# Altium PCB Leiterplatte.PcbDoc
Units mil, origin at the board's own origin, x right, y up, seen from the top; angles counter-clockwise.
Board outline 4527.56 x 2165.36 mil, 2 copper layers (Top Layer, Bottom Layer); 39 components, 62 nets, 272 pads, 218 vias.
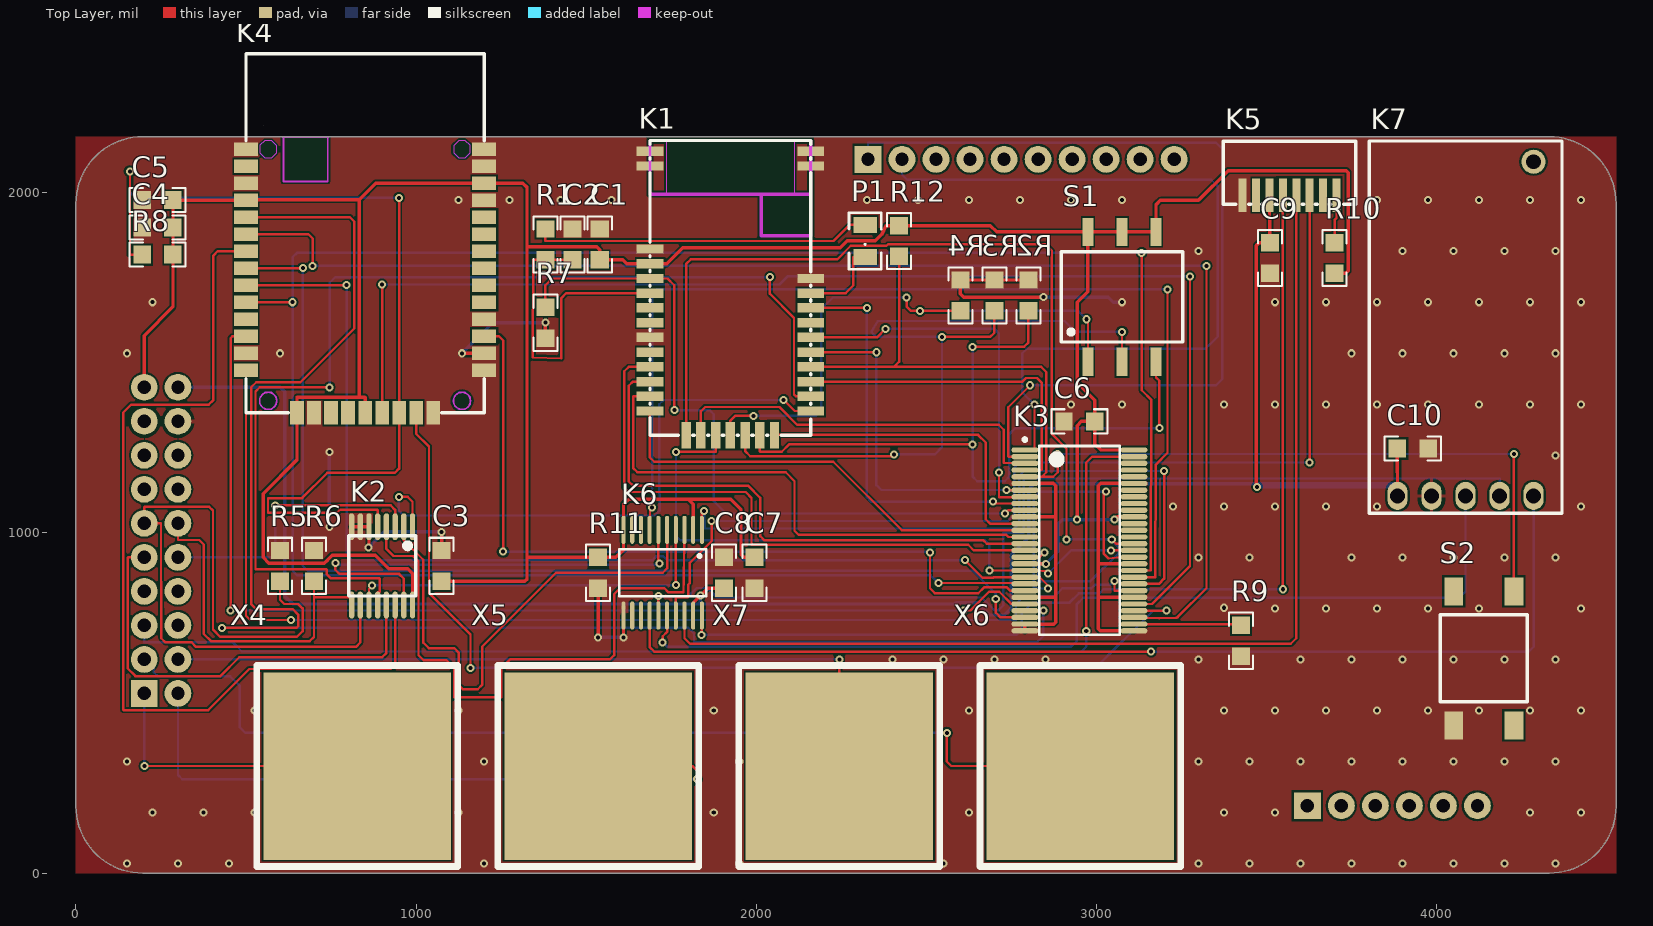
[diagram p0: Top Layer view]
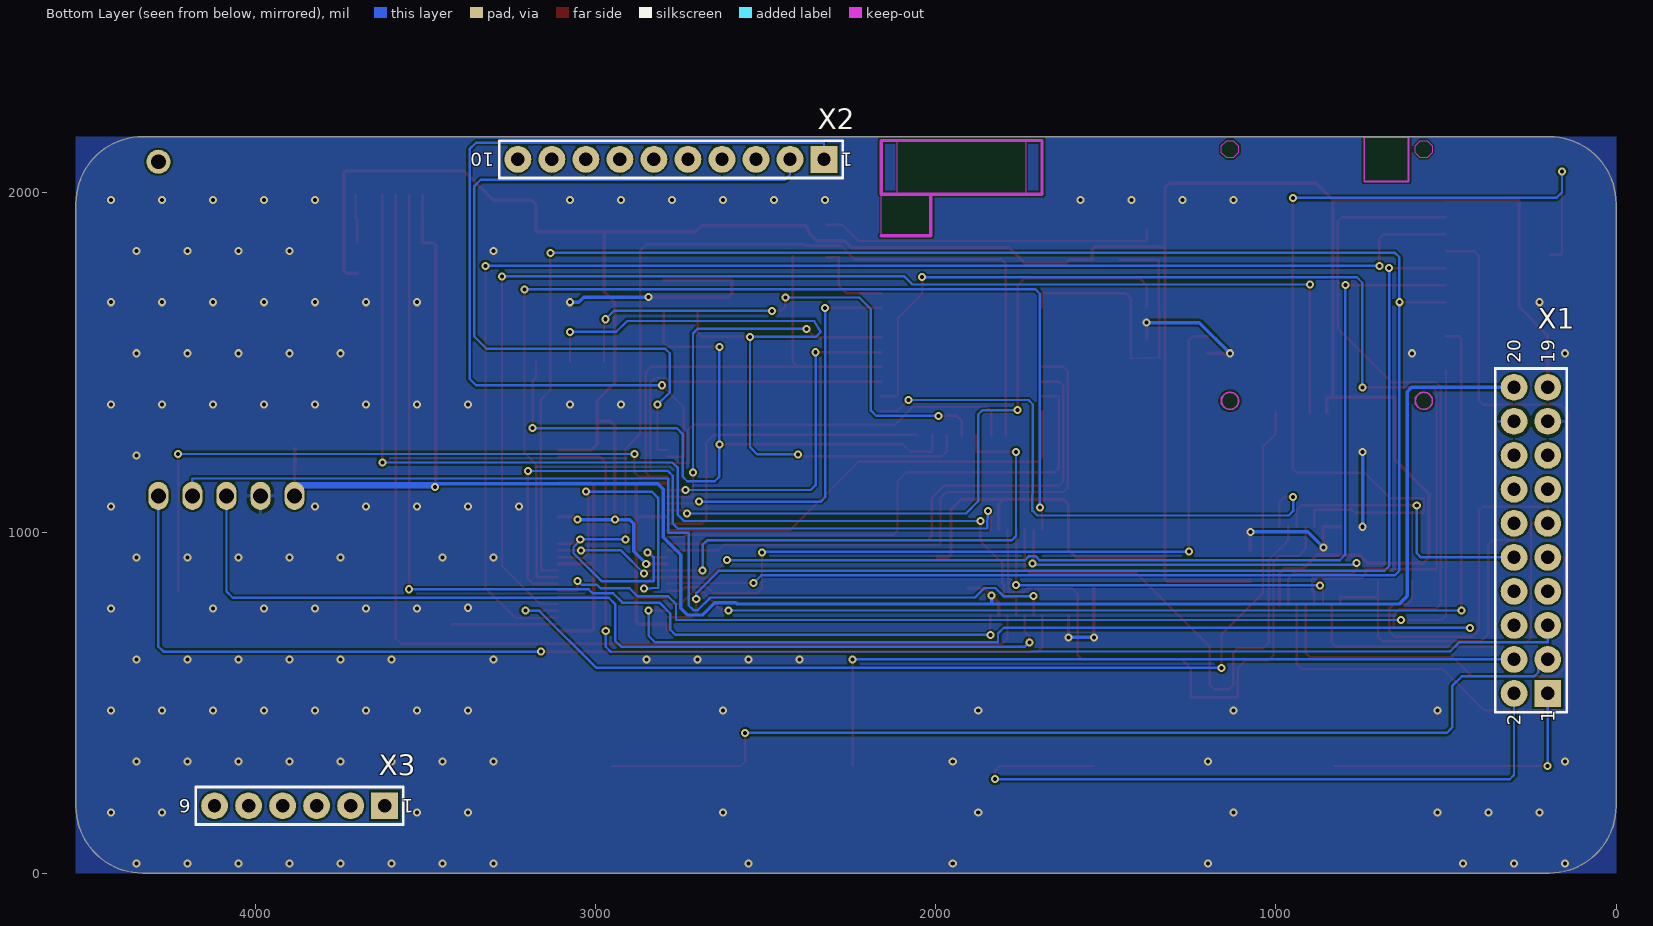
[diagram p1: Bottom Layer view, seen from below]

## Layer stack, top to bottom
Top Solder: solder mask 0.4, Solder Resist, Dk 3.5
Top Layer: signal copper 1.4
Dielectric 1: dielectric 12.6, FR-4, Dk 4.8
Bottom Layer: signal copper 1.4
Bottom Solder: solder mask 0.4, Solder Resist, Dk 3.5

## Board outline
196.85,0 cw(c196.85,196.85) 0,196.85 0,1968.5 cw(c196.85,1968.5) 196.85,2165.35 4330.71,2165.35 cw(c4330.71,1968.5) 4527.56,1968.5 4527.56,196.85 cw(c4330.71,196.85) 4330.71,0

## Design rules (kind name [scope] priority, off if disabled: settings)
AcuteAngle [All] p1: minimum=1.35000000000000E+0002 checktracksonly=FALSE
Clearance [All] p1: gap=6 ignorepadtopadclearanceinfootprint=TRUE
ComponentClearance [All] p1: gap=6 collisioncheckmode=3 verticalgap=6 showdistances=FALSE
HoleSize HoleSize_1 [All] p1: absolutevalues=TRUE maxlimit=100 minlimit=1 maxpercent=80.000 minpercent=20.000
MinimumAnnularRing [All] p1: minimumring=6
MinimumSolderMaskSliver [All] p1: minsoldermaskwidth=6
PlaneClearance [All] p1: clearance=10
PlaneConnect [All] p1: pad.planeconnectstyle=Direct pad.reliefexpansion=20 pad.reliefentries=4 pad.reliefconductorwidth=10 pad.reliefairgap=10 via.planeconnectstyle=Relief via.reliefexpansion=20 via.reliefentries=4 via.reliefconductorwidth=10 via.reliefairgap=10
PolygonConnect [All] p1: thpad.connectstyle=Relief thpad.reliefconductorwidth=10 thpad.reliefentries=4 thpad.polygonreliefangle="90 Angle" thpad.airgapwidth=10 smdpad.connectstyle=Direct smdpad.reliefconductorwidth=10 smdpad.reliefentries=4 smdpad.polygonreliefangle="90 Angle" smdpad.airgapwidth=10 via.connectstyle=Direct via.reliefconductorwidth=10 via.reliefentries=4 via.polygonreliefangle="90 Angle" via.airgapwidth=10
RoutingCorners [All] p1: cornerstyle=45-Degree minsetback=50 maxsetback=50
RoutingVias [All] p1: holewidth=11.81 width=23.62 viastyle="Through Hole" minholewidth=11.81 minwidth=23.62 maxholewidth=11.81 maxwidth=23.62
SMDEntry [All] p1: side=TRUE corner=TRUE anyangle=FALSE
SMDToCorner [All] p1: distance=50000
SilkToSilkClearance [All] p1: silktosilkclearance=6
SilkToSolderMaskClearance [IsPad] p1: minsilkscreentomaskgap=6 clearancetoexposedcopper=TRUE
SolderMaskExpansion [All] p1: expansion=4 istentingtop=FALSE
UnRoutedNet [All] p1: checkbadconnections=TRUE
Width POWER [InNetClass('POWER')] p1: maxlimit=15 minlimit=6 preferedwidth=10
Width STANDARD [All] p2: maxlimit=8 minlimit=6 preferedwidth=7
21 further rules are at their usual default settings.

## Classes and differential pairs
net class POWER: 3.3V 5V GND

## Components (designator, comment, footprint, x,y, rotation, side; value= is the part's Value field where it differs from the comment)
C1 "Capacitor" "CAP CER 0805 H" 1540,1848.35 r270 top value=10u
C2 "Capacitor" "CAP CER 0805 H" 1460,1848.35 r270 top value=1u
C3 "Capacitor" "CAP CER 0805 H" 1075,903.35 r270 top value=100nF
C4 "Capacitor" "CAP CER 0805 H" 240,1898.35 r0 top value=2.2u
C5 "Capacitor" "CAP CER 0805 H" 240,1978.35 r0 top value=0.1u
C6 "Capacitor" "CAP CER 0805 H" 2950,1328.35 r0 top value=100nF
C7 "Capacitor" "CAP CER 0805 H" 1995,883.35 r270 top value=100nF
C8 "Capacitor" "CAP CER 0805 H" 1905,883.35 r270 top value=100nF
C9 "Capacitor" "CAP CER 0805 H" 3510,1808.35 r270 top value=10nF
C10 "Capacitor" "CAP CER 0805 H" 3930,1248.35 r0 top value=10nF
K1 "RN4678" "RN4678 Bluetooth Modul" 1687.56,2122.28 r0 top
K2 "DG4052E" TSSOP-16 900,903.35 r270 top
K3 "PCA9698DGG" TSSOP-56 2950,978.35 r0 top
K4 "RN1810" "RN1810 WLAN" 850,1740.85 r0 top
K5 "TFDU4101" "TFDU4101 INFRAROT MODUL" 3705.59,1993.35 r180 top
K6 "TXS0108EPWR" "TSSOP-20 H" 1725,883.35 r270 top
K7 "RF-UART-434-100M" RF-UART-434-100M 3885,1109.06 r0 top
P1 "LED" "LED 1206 blue R" 2320,1858.35 r90 top
R1 "Resistor" "RES 0805 H" 1380,1848.35 r270 top value=1K
R2 "Resistor" "RES 0805 H" 2800,1698.35 r270 top value=1K
R3 "Resistor" "RES 0805 H" 2700,1698.35 r270 top value=1K
R4 "Resistor" "RES 0805 H" 2600,1698.35 r270 top value=1K
R5 "Resistor" "RES 0805 H" 600,903.35 r270 top value=10k
R6 "Resistor" "RES 0805 H" 700,903.35 r270 top value=10k
R7 "Resistor" "RES 0805 H" 1380,1618.35 r90 top value=1K
R8 "Resistor" "RES 0805 H" 240,1818.35 r0 top value=100k
R9 "Resistor" "RES 0805 H" 3425,683.07 r90 top value=10k
R10 "Resistor" "RES 0805 H" 3700,1808.35 r270 top value=120
R11 "Resistor" "RES 0805 H" 1535,883.35 r90 top value=10k
R12 "Resistor" "RES 0805 H" 2420,1858.35 r90 top value=1K
S1 "DIP-Switch" "DIP Switch SMD 3 H" 3075,1694.29 r0 top
S2 "SW-PB" drucktaster 4050,434.65 r90 top
X1 "20 pole header" "Header THT male 2x10" 250,978.35 r90 bottom locked
X2 "10 pole header" "Header THT male 1x10" 2778.35,2098.35 r0 bottom locked
X3 "6 pole header" "Header THT male 1x6" 3870,198.35 r0 bottom locked
X4 "Header 2" TOUCHPADS 826.77,314.96 r0 top
X5 "Header 2" TOUCHPADS 1535.43,314.96 r0 top
X6 "Header 2" TOUCHPADS 2952.76,314.96 r0 top
X7 "Header 2" TOUCHPADS 2244.09,314.96 r0 top

## Footprints (in the part's own frame and the unit in brackets; to place one, negate y for a bottom-side part, rotate by r counter-clockwise, add the part's x,y. Pads: shape width x height; smd on the part's side, far side on the other; paste and mask are expansions set on the pad)
"CAP CER 0805 H" [mm] "0805 ceramic capacitor for hand soldering"
  rect 1.3x1.35 smd: 1(-1.15,0) 2(1.15,0)
  silkscreen extent -2.1,-0.9 2.1,0.9, body extent -1,-0.62 1,0.63, height 0.8
"DIP Switch SMD 3 H" [mm] "Dipswitch for surface mount / hand soldering"
  rect 0.8x2.1 smd: 1(-2.54,-4.85) 2(0,-4.85) 3(2.54,-4.85) 4(2.54,4.85) 5(0,4.85) 6(-2.54,4.85)
  silkscreen extent -4.54,-3.38 4.55,3.37, body extent -4.54,-4.95 4.55,4.95, height 4.15
drucktaster [mm]
  rect 2.1x1.4 smd: 1(0,0) 4(10,-4.5) ""(0,-4.5) ""(10,0)
  silkscreen extent 1.75,-5.5 8.25,1, body extent 0,-5.25 10,0.75, height 4.3
"Header THT male 1x6" [mm] "header for tht mounting / pitch = 2.54mm"
  rect 2x2 hole 1: 1(-6.35,0)
  round 2 hole 1: 2(-3.81,0) 3(-1.27,0) 4(1.27,0) 5(3.81,0) 6(6.35,0)
  silkscreen extent -7.75,-1.4 7.75,1.4, body extent -7.62,-1.24 7.62,1.25, height 8.54
"Header THT male 1x10" [mm] "header for tht mounting / pitch = 2.54mm"
  rect 2x2 hole 1: 1(-11.43,0)
  round 2 hole 1: 2(-8.89,0) 3(-6.35,0) 4(-3.81,0) 5(-1.27,0) 6(1.27,0) 7(3.81,0) 8(6.35,0) 9(8.89,0) 10(11.43,0)
  silkscreen extent -12.83,-1.4 12.83,1.4, body extent -12.7,-1.24 12.7,1.24, height 8.54
"Header THT male 2x10" [mm] "header for tht mounting / pitch = 2.54mm"
  rect 2x2 hole 1: 1(-11.43,-1.245)
  round 2 hole 1: 2(-11.43,1.27) 3(-8.89,-1.245) 4(-8.89,1.27) 5(-6.35,-1.245) 6(-6.35,1.27) 7(-3.81,-1.245) 8(-3.81,1.27) 9(-1.27,-1.245) 10(-1.27,1.27) 11(1.27,-1.245) 12(1.27,1.27) 13(3.81,-1.245) 14(3.81,1.27) 15(6.35,-1.245) 16(6.35,1.27) 17(8.89,-1.245) 18(8.89,1.27) 19(11.43,-1.245) 20(11.43,1.27)
  silkscreen extent -12.83,-2.67 12.83,2.67, body extent -12.7,-2.51 12.7,2.47, height 8.54
"LED 1206 blue R" [mm] "SMD LED for reflow soldering"
  rect 1.2x1.75 smd: A(1.2,0) C(-1.2,0)
  silkscreen extent -2.1,-1.2 2.1,1.2, body extent -1.6,-0.8 1.6,0.8, height 1.1
"RES 0805 H" [mm] "0805 resistor for hand soldering"
  rect 1.3x1.35 smd: 1(-1.15,0) 2(1.15,0)
  silkscreen extent -2.1,-0.9 2.1,0.9, body extent -1.15,-0.67 1.15,0.68, height 0.76
RF-UART-434-100M [mm]
  oval 1.5x2.1 hole 1.1: 1(0,0) 2(2.54,0) 3(5.08,0) 4(7.62,0) 5(10.16,0)
  round 1.8 hole 1.1: ""(10.16,24.95)
  silkscreen extent -2.12,-1.3 12.28,26.5, body extent -1.28,-1.3 11.42,1.24, height 4.45
"RN1810 WLAN" [mil]
  rect 70x40 smd: 1(-350,387.5) 2(-350,337.5) 3(-350,287.5) 4(-350,237.5) 5(-350,187.5) 6(-350,137.5) 7(-350,87.5) 8(-350,37.5) 9(-350,-12.5) 10(-350,-62.5) 11(-350,-112.5) 12(-350,-162.5) 13(-350,-212.5) 14(-350,-262.5) 24(350,-262.5) 25(350,-212.5) 26(350,-162.5) 27(350,-112.5) 28(350,-62.5) 29(350,-12.5) 30(350,37.5) 31(350,87.5) 32(350,137.5) 33(350,187.5) 34(350,237.5) 35(350,287.5) 36(350,337.5) 37(350,387.5)
  rect 40x70 smd: 15(-200,-387.5) 16(-150,-387.5) 17(-100,-387.5) 18(-50,-387.5) 19(0,-387.5) 20(50,-387.5) 21(100,-387.5) 22(150,-387.5) 23(200,-387.5)
  Top Layer keep-out circle w5: c285,-352.5 r25
  Top Layer keep-out circle w5: c-285,-352.5 r25
  Top Layer keep-out region: -240,292.5 -110,292.5 -110,422.5 -240,422.5
  Top Layer keep-out region: -300,457.5
  Top Layer keep-out region: -295,412.5 -309,398.5 -309,376.5 -295,362.5 -275,362.5 -260,377.5 -260,397.5 -275,412.5
  Top Layer keep-out region: 275,412.5 260,397.5 260,377.5 275,362.5 295,362.5 309,376.5 309,398.5 295,412.5
  Top Layer keep-out region: 275,-327.5 260,-342.5 260,-362.5 275,-377.5 295,-377.5 310,-362.5 310,-342.5 295,-327.5
  Top Layer keep-out region: -295,-327.5 -310,-342.5 -310,-362.5 -295,-377.5 -275,-377.5 -260,-362.5 -260,-342.5 -275,-327.5
  Top Layer keep-out lines w5: -240,292.5 -110,292.5 -110,422.5 -240,422.5 -240,292.5
  Bottom Layer keep-out circle w5: c285,-352.5 r25
  Bottom Layer keep-out circle w5: c-285,-352.5 r25
  Bottom Layer keep-out region: -240,292.5 -110,292.5 -110,422.5 -240,422.5
  Bottom Layer keep-out region: -295,412.5 -310,397.5 -310,377.5 -295,362.5 -275,362.5 -260,377.5 -260,397.5 -275,412.5
  Bottom Layer keep-out region: 275,412.5 260,397.5 260,377.5 275,362.5 295,362.5 310,377.5 310,397.5 295,412.5
  Bottom Layer keep-out region: 275,-327.5 260,-342.5 260,-362.5 275,-377.5 295,-377.5 310,-362.5 310,-342.5 295,-327.5
  Bottom Layer keep-out region: -295,-327.5 -310,-342.5 -310,-362.5 -295,-377.5 -275,-377.5 -260,-362.5 -260,-342.5 -275,-327.5
  Bottom Layer keep-out lines w5: -240,292.5 -110,292.5 -110,422.5 -240,422.5 -240,292.5
  silkscreen extent -350,-388 350,668
"RN4678 Bluetooth Modul" [mm]
  rect 2x0.7 smd: 1(0,0) 2(0,-1.1) 3(0,-7.3) 4(0,-8.4) 5(0,-9.5) 6(0,-10.6) 7(0,-11.7) 8(0,-12.8) 9(0,-13.9) 10(0,-15) 11(0,-16.1) 12(0,-17.2) 13(0,-18.3) 14(0,-19.4) 22(12,-19.4) 23(12,-18.3) 24(12,-17.2) 25(12,-16.1) 26(12,-15) 27(12,-13.9) 28(12,-12.8) 29(12,-11.7) 30(12,-10.6) 31(12,-9.5) 32(12,-1.1) 33(12,0)
  rect 0.7x2 smd: 15(2.7,-21.2) 16(3.8,-21.2) 17(4.9,-21.2) 18(6,-21.2) 19(7.1,-21.2) 20(8.2,-21.2) 21(9.3,-21.2)
  Top Layer keep-out region: 8.3,-6.3 12,-6.3 12,-3.2 8.3,-3.2
  Top Layer keep-out region: 1.2,-3.2 10.8,-3.2 10.8,0.8 1.2,0.8
  Top Layer keep-out lines w0.254: 12,-3.2 12,-6.3 8.3,-6.3 8.3,-3.2 12,-3.2 ; 12,-3.2 0,-3.2 0,0.8 12,0.8 12,-3.2
  Bottom Layer keep-out region: 8.3,-6.3 12,-6.3 12,-3.2 8.3,-3.2
  Bottom Layer keep-out region: 1.2,-3.2 10.8,-3.2 10.8,0.8 1.2,0.8
  Bottom Layer keep-out lines w0.254: 12,-6.3 8.3,-6.3 8.3,-3.2 12,-3.2 ; 12,-3.2 0,-3.2 0,0.8 12,0.8 12,-3.2
  silkscreen extent 0,-21.2 12,0.8, body extent 0,-21.2 12,0.8, height 2.4
"TFDU4101 INFRAROT MODUL" [mm]
  rect 0.6x2.5 smd: 1(0,0) 2(1,0) 3(2,0) 4(3,0) 5(4,0) 6(5,0) 7(6,0) 8(7,0)
  silkscreen extent -1.45,-4.02 8.45,0.67, body extent -1.45,-4.02 8.45,0.68, height 4.15
TOUCHPADS [mm]
  rect 14x14 smd: 1(0,0)
  silkscreen extent -7.5,-7.5 7.5,7.5
TSSOP-16 [mm]
  oval 2x0.4 smd: 1(-2.925,2.275) 2(-2.925,1.625) 3(-2.925,0.975) 4(-2.925,0.325) 5(-2.925,-0.325) 6(-2.925,-0.975) 7(-2.925,-1.625) 8(-2.925,-2.275) 9(2.925,-2.275) 10(2.925,-1.625) 11(2.925,-0.975) 12(2.925,-0.325) 13(2.925,0.325) 14(2.925,0.975) 15(2.925,1.625) 16(2.925,2.275)
  silkscreen extent -2.25,-2.5 2.25,2.5, body extent -3.2,-2.55 3.2,2.55, height 1.1
"TSSOP-20 H" [mm] "TSSOP-20 for hand soldering"
  oval 2.1x0.3 smd: 1(-3.2,2.925) 2(-3.2,2.275) 3(-3.2,1.625) 4(-3.2,0.975) 5(-3.2,0.325) 6(-3.2,-0.325) 7(-3.2,-0.975) 8(-3.2,-1.625) 9(-3.2,-2.275) 10(-3.2,-2.925) 11(3.2,-2.925) 12(3.2,-2.275) 13(3.2,-1.625) 14(3.2,-0.975) 15(3.2,-0.325) 16(3.2,0.325) 17(3.2,0.975) 18(3.2,1.625) 19(3.2,2.275) 20(3.2,2.925)
  silkscreen extent -1.75,-3.25 1.75,3.25, body extent -3.2,-3.25 3.2,3.25, height 1.2
TSSOP-56 [mm]
  oval 2x0.4 smd: 1(-4.075,6.75) 2(-4.075,6.25) 3(-4.075,5.75) 4(-4.075,5.25) 5(-4.075,4.75) 6(-4.075,4.25) 7(-4.075,3.75) 8(-4.075,3.25) 9(-4.075,2.75) 10(-4.075,2.25) 11(-4.075,1.75) 12(-4.075,1.25) 13(-4.075,0.75) 14(-4.075,0.25) 15(-4.075,-0.25) 16(-4.075,-0.75) 17(-4.075,-1.25) 18(-4.075,-1.75) 19(-4.075,-2.25) 20(-4.075,-2.75) 21(-4.075,-3.25) 22(-4.075,-3.75) 23(-4.075,-4.25) 24(-4.075,-4.75) 25(-4.075,-5.25) 26(-4.075,-5.75) 27(-4.075,-6.25) 28(-4.075,-6.75) 29(4.075,-6.75) 30(4.075,-6.25) 31(4.075,-5.75) 32(4.075,-5.25) 33(4.075,-4.75) 34(4.075,-4.25) 35(4.075,-3.75) 36(4.075,-3.25) 37(4.075,-2.75) 38(4.075,-2.25) 39(4.075,-1.75) 40(4.075,-1.25) 41(4.075,-0.75) 42(4.075,-0.25) 43(4.075,0.25) 44(4.075,0.75) 45(4.075,1.25) 46(4.075,1.75) 47(4.075,2.25) 48(4.075,2.75) 49(4.075,3.25) 50(4.075,3.75) 51(4.075,4.25) 52(4.075,4.75) 53(4.075,5.25) 54(4.075,5.75) 55(4.075,6.25) 56(4.075,6.75)
  silkscreen extent -4.2,-7.05 3,7.65, body extent -4.1,-7.05 4,7.05, height 1.2

## Part data
C1 C2 C3 C4 C5 C6 C7 C8 C9 C10: "Non polarized capacitor", LatestRevisionDate=01.04.2019, Publisher="ICT Berufsbildungscenter AG"
K1: library part Bluetooth-Modul, "Bluetooth-Module (802.15.1) Bluetooth 5 Dual Mode with Shield & Antenna Module with ASCII Interface FW 1.11", Supplier Part Number 1=579-RN4678-V/RM111, ComponentLink1Description="New link", ComponentLink1URL=https://www.mouser.ch/ProductDetail/Microchip-Technology/RN4678-V-RM111/?qs=sGAEpiMZZMu3sxpa5v1qrgkV%252BmLWY283d9hxH7L%2F%2FyI%3D, Supplier 1=Mouser
K2: library part AnalogSwitch, "Analogschalter IC Dual 4 Ch Multiplxr Pd 450mW TSSOP-16", Supplier Part Number 1=78-DG4052EEQ-T1-GE3, ComponentLink1Description="New link", ComponentLink1URL=https://www.mouser.ch/ProductDetail/Vishay-Siliconix/DG4052EEQ-T1-GE3/?qs=sGAEpiMZZMutXGli8Ay4kBLYPnxy%2FFiifqIQaprXThA%3D, Supplier 1=Mouser
K3: library part PortExpander, "Schnittstelle - I/O-Erweiterer 40BT I2C FM+TPGPIO IN-RS-PU OE", Supplier Part Number 1=771-PCA9698DGG-T, ComponentLink1Description="New link", ComponentLink1URL=https://www.mouser.ch/ProductDetail/NXP-Semiconductors/PCA9698DGG518/?qs=LOCUfHb8d9vt%2F8QN9%2FBdTQ%3D%3D, Supplier 1=Mouser
K4: library part WLAN-Modul, "WLAN-Module (802.11) On board WiFiWiFly UART and PCB antenna", Supplier Part Number 1=579-RN1810IRM110, ComponentLink1Description="New link", ComponentLink1URL=https://www.mouser.ch/ProductDetail/Microchip-Technology/RN1810-I-RM110/?qs=Gd3Cm49KlLOYbRKPwYAFPg%3D%3D, Supplier 1=Mouser
K5: library part Infrarot-Modul, "Infrarot-Transceiver SIR 115.2 kbits/s", Supplier Part Number 1=782-TFDU4101, ComponentLink1Description="New link", ComponentLink1URL=https://www.mouser.ch/ProductDetail/Vishay-Semiconductors/TFDU4101-TR3/?qs=4vzNq8kLoSZaXF7Bmpq4%252Bw%3D%3D, Supplier 1=Mouser
K6: "Level Shifter with internal pullups", Supplier Part Number 1=595-TXS0108EPWR, Supplier 1=Mouser
K7: library part RF-Modul, "RF-Modul UART/TTL Interface 100M", ComponentLink1Description="New link", ComponentLink1URL=https://www.cytron.io/p-434mhz-rf-transceiver-module-uart-100m
P1: "Light emitting diode", LatestRevisionDate=03.04.2019, Publisher="ICT Berufsbildungscenter AG"
S1: library part "DIP-Switch 3", "Dip Switch with 3 switches", ComponentLink1Description="Manufacturer Link", ComponentLink1URL=http://www.oupiin.com/prodindx.html#Headers, LatestRevisionDate=03.10.2019, Published=03.10.2019, Publisher="ICT Berufsbildungscenter AG"
S2: library part Drucktaster, "Switch, SMD", LatestRevisionDate=17-Jul-2002, LatestRevisionNote="Re-released for DXP Platform.", PackageDescription="Switch; 2 Leads", PackageReference=SPST-2, Published=24-Mar-1999, Publisher="Altium Limited"
X1: library part "Header 20", "board to board header", LatestRevisionDate=02.05.2019, Publisher="ICT Berufsbildungscenter AG"
X2: library part "Header 10", "board to board header", LatestRevisionDate=02.05.2019, Publisher="ICT Berufsbildungscenter AG"
X3: library part "Header 6", "board to board header", LatestRevisionDate=02.05.2019, Publisher="ICT Berufsbildungscenter AG"
X4 X5 X6 X7: library part "Header 1", "Header, 2-Pin", LatestRevisionDate=17-Jul-2002, LatestRevisionNote="Re-released for DXP Platform.", Publisher="Altium Limited"
R1 R2 R3 R4 R5 R6 R7 R8 R9 R10 R11 R12: LatestRevisionDate=02.04.2019, Publisher="ICT Berufsbildungscenter AG"

## Via types
v1: diameter 23.62, hole 11.81, Top Layer to Bottom Layer, 218 vias

## Nets (pads, with @x,y where several pads share a name; then routed paths per layer and width w, separated by ;. In a path a pad name is that pad's centre, name@x,y a point inside that pad or via, vN(x,y) a via of type N, cw(c..) or ccw(c..) an arc to the next point about the centre after c; other vN are vias at no path point)
3.3V: C1.2 C3.2 C4.2 C5.2 C6.2 C7.1 K1.4 K2.16 K3.18 K3.46 K3.56 K4.4 K4.15 K4.19 K4.35 K6.2 K6.10 R8.2 R10.2 R11.2 R12.2 S1.4 S1.5 S1.6 X1.19 | length 10533.3
  Top Layer w10: X1.19 200.99,1580.35 285.28,1664.63 R8.2 C4.2 C5.2 K4.4 501.56,1979.91 833,1979.91 881.44,2028.35 K4.35 1313.5,2028.35 1326,2015.85 1326,1838.35 ; 833,1978.93 833,1399.6 832.75,1399.35 ; K4.19 850,1398.35 849,1399.35 832.75,1399.35 ; K2.16 989.57,879.78 975,894.35 919.5,894.35 879.5,934.35 753.24,934.35 739.69,920.8 739.69,920.59 730.45,911.35 567.19,911.35 550.19,928.35 550.19,1115.35 650,1215.16 K4.15 650,1398.35 651,1399.35 832.75,1399.35 ; C3.2 1319.72,858.07 1326,864.35 1326,928.62 ; K6.2 1814.57,1084.78 1800,1099.35 ; C7.1 1963.43,928.62 1955,937.05 1955,1069.35 1925,1099.35 1800,1099.35 ; K3.18 v1(2851,909.45) ; v1(2943,1039.35) 2943,1315.85 2955.5,1328.35 C6.2 ; v1(3053,1039.35) 3060.9,1047.24 K3.46 ; K3.56 3012.5,1244.09 2995.28,1261.32 C6.2 ; R10.2 3731.57,1763.07 3740,1771.5 3740,2059.49 3734.14,2065.35 3387.5,2065.35 3300,1977.85 3187.5,1977.85 3175,1965.35 S1.4 S1.5 S1.6 ; 1326,928.62 1326,1838.35 ; 1326,928.62 R11.2 1587.5,928.62 1609.84,950.96 K6.10 1609.84,1084.19 1625,1099.35 1800,1099.35 ; 1326,1838.35 1329,1841.35 1531.14,1841.35 1540,1832.49 C1.2 1608,1803.07 1619.5,1791.57 K1.4 1737,1791.57 1784.03,1838.6 2246.8,1838.6 2266.93,1858.73 2350,1858.73 2369,1877.73 2381.78,1903.62 R12.2 2688,1903.62 2706.38,1885.24 S1.6 ; S1.6 2975,1709.35 2944,1678.35 2944,1441.35 2995.28,1390.07 C6.2
  Bottom Layer w10: v1(2851,909.45) 2887.5,945.95 2887.5,1026.85 2900,1039.35 v1(2943,1039.35) v1(3053,1039.35)
5V: C8.2 C9.1 C10.1 K5.6 K6.19 K7.1 X1.20 | length 6210.7
  Top Layer w10: K6.19 1814.91,757.71 1814.91,795.26 v1(1836,816.35) ; v1@1833.39,813.74 1857.72,838.07 C8.2 ; v1(3472,1135.35) 3470,1137.35 3470,1845.2 3478.43,1853.62 C9.1 3510,1922.35 3508.74,1923.61 K5.6 ; C10.1 3884.72,1178.62 3885,1178.35 K7.1
  Bottom Layer w10: X1.20 601.5,1428.35 614,1415.85 614,814.85 637.5,791.35 1835,791.35 ; v1@1836,814.85 v1(1836,816.35) 1835,815.35 1835,791.35 ; v1(3472,1135.35) K7.1@3885,1135.35 ; K7.1 K7.1@3885,1135.35 ; 1835,791.35 2583,791.35 2587,795.35 2650,795.35 2686.5,758.85 2729.62,758.85 2749.12,778.35 2749.12,935.66 2800.81,987.35 2800.81,1128.35 2816.81,1144.35 3885,1144.35 K7.1@3885,1135.35
aIR_IO_1: K3.36 K6.1 | length 2026.7
  Top Layer w7: K6.1 1840.16,1063.35 1841.16,1064.35 v1(1847,1064.35) ; K3.36 3183.55,850.39 3199,865.85 v1(3199,1182.35)
  Bottom Layer w7: v1(1847,1064.35) 1848,1013.35 2758.31,1013.35 2773.31,1028.35 2773.31,1168.16 2787.5,1182.35 v1(3199,1182.35)
aIR_RX: K2.4 K6.3 | length 1807.2
  Top Layer w7: K2.4 912.8,953.35 933.8,932.35 990.5,932.35 1007,915.85 1007,640.85 1021.79,626.05 1089.29,626.05 1112,603.35 1112,517.35 1250,516.85 1250,601.85 1276.5,628.35 1569.5,628.35 1582,640.85 1582,820.03 1600,838.03 1729.57,838.03 1742.07,825.53 1786,825.53 1787.07,865.57 K6.3
aIR_TX: K2.11 K6.4 | length 1116.5
  Top Layer w7: K2.11 861.61,835.96 v1(871,845.35) ; v1(1763.39,846.85) K6.4
  Bottom Layer w7: v1(871,845.35) 872.5,846.85 v1(1763.39,846.85)
aRF_IO_1: K3.37 K6.7 | length 3144.2
  Top Layer w7: K6.7 1687.61,1075.35 v1(1694,1075.35) ; K3.37 3173.35,870.08 3174.61,1201.46 3209,1235.85 v1(3209,1716.35)
  Bottom Layer w7: v1(1694,1075.35) 1694,1703.35 1707,1716.35 v1(3209,1716.35)
aRF_RX: K2.2 K6.5 | length 1520
  Top Layer w7: K2.2 963.98,978.35 1021,921.32 1021,677.85 1037.5,661.35 1112.5,661.35 1125,648.85 1125,553.35 1137.5,540.85 1181.5,540.85 1194,553.35 1194,665.85 1411.5,883.35 1725,883.35 1737.8,896.14 K6.5
aRF_TX: K2.15 K6.6 | length 1368.2
  Top Layer w7: v1(762.5,911.35) 762.5,892.16 775,879.66 950.16,879.66 963.98,865.85 K2.15 ; K6.6 1712.2,914.14 v1(1716,910.35)
  Bottom Layer w7: v1(762.5,911.35) 762.5,908.35 763.82,907.02 1712.68,907.02 v1(1716,910.35)
bIR_IO_1: K5.5 K6.20 | length 3008.8
  Top Layer w7: v1(1839,700.35) 1840.16,701.5 K6.20 ; v1(3548.11,834.66) K5.5
  Bottom Layer w7: v1(1839,700.35) 2765,700.35 2780.5,715.85 2780.5,763.35 2812.5,795.35 2921,795.35 2948.5,822.85 3008.69,822.85 3020.5,834.66 v1(3548.11,834.66)
bIR_RX: K5.4 K6.18 | length 3181.2
  Top Layer w7: K6.18 1788.98,690.85 1805.48,674.35 3570.98,674.35 3587.48,690.85 K5.4
bIR_TX: K5.3 K6.17 | length 3037.1
  Top Layer w7: K6.17 1763.39,810.35 1764.39,811.35 1798.07,811.35 1800.07,813.35 1800.07,848.41 1805,853.35 1805,912.35 1869,976.35 v1(1869,1035.35) ; v1(3626.85,1207.35) K5.3
  Bottom Layer w7: v1(1869,1035.35) 2739.83,1035.35 2757.83,1053.35 2757.83,1190.85 2774.33,1207.35 v1(3626.85,1207.35)
bRF_IO_1: K6.14 K7.5 | length 3145.8
  Top Layer w7: K6.14 1686.61,664.73 1700,651.35 v1(3161,651.35)
  Bottom Layer w7: v1(3161,651.35) 4270.5,651.35 4285,665.85 K7.5
bRF_RX: K6.16 K7.3 | length 2860.2
  Top Layer w7: v1(1725,678.53) 1725,696.35 1737.8,709.14 K6.16
  Bottom Layer w7: v1(1725,678.53) 1737.5,666.03 2925,666.03 2942.42,683.46 2942.42,790.85 2961.42,809.85 4066.5,809.85 4085,828.35 K7.3
bRF_TX: K6.15 K7.4 | length 2995
  Top Layer w7: v1(1712,814.35) 1712.2,814.14 K6.15
  Bottom Layer w7: v1(1712,814.35) 1801,814.35 1825,838.35 1857,838.35 1885,810.35 2662.5,810.35 2699.5,773.35 2712.5,773.35 2726,786.85 2726,999.35 2727,1000.35 2785.31,1000.35 2786.31,1001.35 2786.31,1159.35 2787.31,1160.35 4184,1160.35 4185,1159.35 K7.4
BT_CTS: K1.15 K3.17 K3.42 | length 3155.1
  Top Layer w7: K1.15 1793.86,1790.85 1807.72,1804.7 2238.4,1804.7 2277.93,1844.23 2383,1844.23 2387.12,1848.35 2850,1848.35 2869,1829.35 2869,1290.85 2912,1247.85 v1(2912,981.35) ; K3.17 2832.79,929.13 v1(2847,943.35) ; v1(3045,981.35) 3057.84,968.5 K3.42
  Bottom Layer w7: v1(2847,943.35) 2844,943.35 2829,928.35 2829,859.51 2830,858.51 2982.69,858.51 3064.81,940.64 3064.81,958.35 3045,978.16 v1(3045,981.35) v1(2912,981.35)
BT_IO_1: K1.16 K3.3 | length 1152.9
  Top Layer w7: K1.16 1837.17,1357.7 1850,1370.53 2067.94,1370.53 2120.13,1318.35 2712.69,1318.35 2727.69,1303.35 2727.69,1206.03 K3.3
BT_IO_2: K1.24 K3.4 | length 995.2
  Top Layer w7: K1.24 2782.45,1445.12 2792.99,1455.66 2825,1455.66 2839.53,1441.13 2839.53,1186.35 2838.22,1185.04 K3.4
BT_IO_4: K1.26 K3.7 | length 1026.6
  Top Layer w7: K1.26 2352.61,1531.73 v1(2353,1531.35) ; v1(2735,1126.35) 2735,1125.98 K3.7
  Bottom Layer w7: v1(2353,1531.35) 2353,1140.85 2367.5,1126.35 v1(2735,1126.35)
BT_IO_5: K1.27 K3.8 | length 1128.6
  Top Layer w7: K1.27 2354.69,1575.04 v1(2380,1600.35) ; v1(2713.69,1178.35) 2713.69,1105.98 2715,1104.67 2756.7,1104.67 2756.7,1106.3 K3.8
  Bottom Layer w7: v1(2380,1600.35) 2700,1600.35 2713.69,1586.66 v1(2713.69,1178.35)
BT_IO_6: K1.29 K3.9 | length 1193.9
  Top Layer w7: K1.29 v1(2324.9,1661.65) ; v1(2696,1092.35) 2701.73,1086.61 K3.9
  Bottom Layer w7: v1(2324.9,1661.65) 2324.9,1104.94 2337.5,1092.35 v1(2696,1092.35)
BT_IO_7: K1.5 K3.10 R7.2 | length 2137.2
  Top Layer w7: R7.2 1380,1728.35 1399.92,1748.27 K1.5 1739.08,1748.27 1759,1728.35 v1(1759,1361.35) ; v1(2731,1057.35) 2740.58,1066.93 K3.10
  Bottom Layer w7: v1(1759,1361.35) 1862.5,1361.35 1875,1348.85 1875,1093.66 1911.31,1057.35 v1(2731,1057.35)
BT_IO_8: K1.21 K3.12 | length 976.7
  Top Layer w7: K1.21 2053.7,1288.35 2652.19,1288.35 2674.69,1265.85 2674.69,1040.37 2687.5,1027.56 K3.12
BT_IO_9: K1.14 K3.13 | length 1328.1
  Top Layer w7: K1.14 1687,1358.5 1687,1222.35 1700,1209.35 2226.5,1209.35 2427.97,1007.87 K3.13
BT_IO_10: K1.13 K3.14 | length 1580.7
  Top Layer w7: K1.13 1639,1401.81 1638,1400.81 1638,1190.85 1650.5,1178.35 2086.5,1178.35 2112.5,1152.35 2112.5,1006.85 2125,994.35 2734.84,994.35 2741,988.19 K3.14
BT_IO_11: K1.12 K3.15 | length 1654.9
  Top Layer w7: K1.12 1637.5,1445.12 1625,1432.62 1625,1151.85 1637.5,1139.35 1975.58,1139.35 2011.65,1103.27 2011.65,990.85 2024.22,978.27 2667.57,978.27 2677.33,968.5 K3.15
BT_IO_12: K1.11 K3.16 | length 1757.3
  Top Layer w7: K1.11 1625,1488.42 1612,1475.42 1612,1133.35 1625,1120.35 1969.08,1120.35 1986.08,1103.35 1986.08,966.35 1987.15,965.27 2623,965.27 2639.45,948.82 K3.16
BT_PAIR: K1.25 K3.5 R12.1 S2.4 | length 3244
  Top Layer w7: K1.25 2405.08,1488.42 ; R12.1 2420,1503.35 2405.08,1488.42 ; K3.5 2839.54,1165.35 ; v1(2886,1232.35) 2886,1178.35 2873.01,1165.35 2839.54,1165.35 ; S2.4 v1(4227.17,1232.35) ; 2405.08,1488.42 2837.5,1488.42 2852.53,1473.39 2852.53,1178.35 2839.54,1165.35
  Bottom Layer w7: v1(2886,1232.35) v1(4227.17,1232.35)
BT_RTS: K1.17 K3.19 K3.41 | length 1876.9
  Top Layer w7: v1(1764,1238.35) 1879.47,1238.35 1880.47,1239.35 K1.17 ; v1(2685,889.76) K3.19 2829,889.76 2850,887.35 v1(2857,880.35) ; v1(3042.51,948.82) K3.41
  Bottom Layer w7: v1(1764,1238.35) 1764,990.85 1776.5,978.35 2672.5,978.35 2685,965.85 v1(2685,889.76) ; v1(2857,880.35) 2925.47,948.82 v1(3042.51,948.82)
BT_RX: K1.22 K2.1 | length 1715.3
  Top Layer w7: v1(949.5,1106.35) 975,1106.35 989.57,1091.78 K2.1 ; v1(2080.63,1390.85) 2112.97,1358.5 K1.22
  Bottom Layer w7: v1(949.5,1106.35) 949.5,1064.35 962.5,1051.35 1701.5,1051.35 1716,1065.85 1715,1163.35 1715,1378.35 1727.5,1390.85 v1(2080.63,1390.85)
BT_TX: K1.23 K2.12 | length 3245.7
  Top Layer w7: v1(746,1428.35) 540.5,1428.35 528,1415.85 528,894.35 529,893.35 736,893.35 737,892.35 737,879.66 750,866.66 892,866.66 893,865.66 893,827.35 892,826.35 887.2,826.35 K2.12 ; v1(2040,1752.35) 2040,1703.35 2111,1632.35 2111,1407.35 2116.54,1401.81 K1.23
  Bottom Layer w7: v1(746,1428.35) 746,1735.85 762.5,1752.35 v1(2040,1752.35)
GND: C1.1 C2.1 C3.1 C4.1 C5.1 C6.1 C7.2 C8.1 C9.2 C10.2 K1.1 K1.2 K1.3 K1.9 K1.31 K1.32 K1.33 K2.6 K2.7 K2.8 K3.6 K3.11 K3.23 K3.27 K3.28 K3.29 K3.34 K3.39 K3.51 K4.1 K4.3 K4.13 K4.16 K4.23 K4.24 K4.25 K4.27 K4.34 K4.36 K4.37 K5.8 K6.11 K7.2 R2.1 R3.1 R4.1 R5.1 R6.1 R7.1 R9.1 R11.1 S2.1 X1.17 X1.18 | length 3659
  Top Layer w10: K2.8 K2.7 K2.6 861.61,958.77 v1(860,957.16) ; C3.1 v1(1075,1003.35) ; v1(1135,1528.35) K4.25 ; R7.1 v1(1380,1618.35) ; v1(1535,693.35) R11.1 ; K6.11 1609.84,693.5 v1(1610,693.35) ; K3.28 K3.27 2874.14,732.28 2880,738.14 2880,808.35 ; K3.23 2877.32,811.02 2880,808.35 ; K3.11 2878.9,1047.24 2880,1048.35 ; K3.6 2872.68,1145.67 2880,1138.35 2880,1048.35 ; R2.1 R3.1 R4.1 2600,1703.35 2610,1693.35 v1(2845,1693.35) ; 3006.26,811.22 3006.46,811.02 K3.34 ; K3.29 3010.86,712.6 3005,718.46 3005,908.35 ; K3.39 3006.1,909.45 3005,908.35 ; K3.51 3012.32,1145.67 3005,1138.35 3005,908.35 ; 2880,808.35 2880,1048.35
  Bottom Layer w10: v1(745,1018.35) v1(745,1238.35) ; v1(860,957.16) 906.19,1003.35 v1(1075,1003.35) ; v1(1135,1528.35) 1225,1618.35 v1(1380,1618.35) ; v1(1535,693.35) v1(1610,693.35) ; v1(2845,1693.35) 3035,1693.35 3050,1678.35 v1(3075,1678.35)
  other v1: 150,28.35 300,28.35 450,28.35 1200,28.35 1950,28.35 2550,28.35 3300,28.35 3450,28.35 3600,28.35 3750,28.35 3900,28.35 4050,28.35 4200,28.35 4350,28.35 225,178.35 375,178.35 525,178.35 1125,178.35 1875,178.35 2625,178.35 3375,178.35 3525,178.35 4275,178.35 4425,178.35 150,328.35 1200,328.35 1950,328.35 3300,328.35 3450,328.35 3600,328.35 3750,328.35 3900,328.35 4050,328.35 4200,328.35 4350,328.35 525,478.35 1125,478.35 1875,478.35 2625,478.35 3375,478.35 3525,478.35 3675,478.35 3825,478.35 3975,478.35 4125,478.35 4275,478.35 4425,478.35 2400,628.35 2550,628.35 2700,628.35 2850,628.35 3300,628.35 3600,628.35 3750,628.35 3900,628.35 4050,628.35 4200,628.35 4350,628.35 3525,778.35 3675,778.35 3825,778.35 3975,778.35 4125,778.35 4425,778.35 3375,780.25 3300,928.35 3450,928.35 3750,928.35 3900,928.35 4050,928.35 4200,928.35 4350,928.35 3225,1078.35 3375,1078.35 3525,1078.35 3675,1078.35 3825,1078.35 4425,1078.35 4350,1228.35 2925,1378.35 3075,1378.35 3375,1378.35 3525,1378.35 3675,1378.35 3825,1378.35 3975,1378.35 4125,1378.35 4275,1378.35 4425,1378.35 150,1528.35 600,1528.35 3750,1528.35 3900,1528.35 4050,1528.35 4200,1528.35 4350,1528.35 225,1678.35 3525,1678.35 3675,1678.35 3825,1678.35 3975,1678.35 4125,1678.35 4275,1678.35 4425,1678.35 3300,1828.35 3900,1828.35 4050,1828.35 4200,1828.35 4350,1828.35 1125,1978.35 1275,1978.35 1425,1978.35 1575,1978.35 2325,1978.35 2475,1978.35 2625,1978.35 2775,1978.35 2925,1978.35 3075,1978.35 3825,1978.35 3975,1978.35 4125,1978.35 4275,1978.35 4425,1978.35
I\N\T\: K3.55 X1.5 | length 3523.9
  Top Layer w7: v1(2970,711.35) 2970,1206.91 2987.5,1224.41 K3.55
  Bottom Layer w7: X1.5 200.99,679.35 461.5,678.35 487.5,652.35 2954.5,650.35 2970,665.85 v1(2970,711.35)
NetC2_2: C2.2 K1.6 K1.7 R1.2 | length 975
  Top Layer w7: C2.2 R1.2 1344,1803.07 1343,1515.85 1427,1512.85 1427,1690.85 1441.11,1704.96 K1.6 K1.7
NetK1_18: K1.18 R4.2 S1.1 | length 1702
  Top Layer w7: K1.18 1923.78,1330.63 1937.5,1344.35 v1(1992,1344.35) ; v1(2442,1692.35) 2442,1665.85 2454.78,1653.07 v1(2481.28,1653.07) R4.2 ; v1(2971,1628.35) 2975,1624.35 S1.1
  Bottom Layer w7: v1(1992,1344.35) 2175,1344.35 2190.5,1359.85 2190.5,1657.85 2225,1692.35 v1(2442,1692.35) ; v1(2481.28,1653.07) 2946.28,1653.07 v1(2971,1628.35)
NetK1_19: K1.19 R3.2 S1.2 | length 2260.8
  Top Layer w7: K1.19 1967.09,1240.85 1982.17,1225.77 2399.42,1225.77 v1(2405,1231.35) ; v1(2546,1576.35) 2687.5,1576.35 2700,1588.85 R3.2 ; S1.2 v1(3075,1591.35)
  Bottom Layer w7: v1(2405,1231.35) 2525,1231.35 2546,1252.35 v1(2546,1576.35) 2352.5,1576.35 2338,1590.85 2358,1623.35 2907,1623.35 2939,1591.35 v1(3075,1591.35)
NetK1_20: K1.20 R2.2 S1.3 | length 2218
  Top Layer w7: K1.20 2010.39,1240.35 2011.97,1238.77 2074.92,1238.77 2096.5,1260.35 v1(2636,1260.35) ; v1(2636,1547.35) 2787.5,1547.35 2800,1559.85 R2.2 ; S1.3 3175,1457.35 3185,1447.35 v1(3185,1308.35)
  Bottom Layer w7: v1(2636,1547.35) v1(2636,1260.35) 2636,1165.85 2649.5,1152.35 2730.5,1152.35 2744,1165.85 2744,1290.85 2761.5,1308.35 v1(3185,1308.35)
NetK1_30: K1.30 P1.C | length 252.8
  Top Layer w7: K1.30 2262.5,1704.96 2285.25,1727.71 2285.25,1811.1 P1.C
NetK2_9: K2.9 R6.2 X1.12 | length 1027
  Top Layer w7: X1.12 300,980.35 301,979.35 362.5,979.35 376,965.85 376,703.35 397.3,682.04 687.5,682.04 700,694.54 R6.2 ; 700.64,811.45 700.75,811.35 810.43,811.35 K2.9
NetK2_10: K2.10 R5.2 X1.11 | length 2179.3
  Top Layer w7: R5.2 600,803.8 612.5,791.3 653.35,791.3 666.31,778.35 666.31,711.36 650,695.04 423.8,695.04 403,715.85 403,1065.85 391.5,1077.35 201.99,1077.35 200.99,1076.35 X1.11 250,1028.35 251,690.85 263.5,678.35 340.5,678.35 353.5,665.35 823.02,665.35 836.02,678.35 K2.10
NetK3_30: K3.30 R9.2 | length 316.2
  Top Layer w7: K3.30 3421.06,732.28 R9.2
NetK5_1: K5.1 R10.1 | length 142
  Top Layer w7: R10.1 3700,1920.35 3705.59,1925.94 K5.1
NetP1_A: P1.A R1.1 | length 994.3
  Top Layer w7: R1.1 1380,1859.35 1381,1858.35 2227.05,1858.35 2274.29,1905.59 P1.A
PIC_RX: K2.13 X1.9 | length 1313.7
  Top Layer w7: X1.9 153,928.35 152,927.35 152,602.35 175,579.35 425,579.35 480.31,634.66 900,634.66 912.8,647.45 K2.13
PIC_TX: K2.3 X1.10 | length 839.1
  Top Layer w7: v1(586,1081.35) 925,1081.35 938.39,1067.96 K2.3
  Bottom Layer w7: X1.10 573.5,928.35 586,940.85 v1(586,1081.35)
SCL: K3.2 X2.1 | length 2631.7
  Top Layer w7: K3.2 2742,1224.41 2740.69,1225.72 2740.69,1369.55 2804,1432.85 v1(2804,1434.35)
  Bottom Layer w7: X2.1 2328.35,2146.35 2329.35,2147.35 3351.31,2147.35 3370.31,2128.35 3370.31,1453.35 3351.31,1434.35 v1(2804,1434.35)
SDA: K3.1 X2.2 | length 2351.8
  Top Layer w7: K3.1 2818,1244.09 v1(2818,1377.35)
  Bottom Layer w7: X2.2 2428.35,2053.35 2443.35,2038.35 3337.5,2038.35 3357,2018.85 3357,1578.35 3320,1541.35 2795,1541.35 2782,1528.35 2782,1413.35 v1(2818,1377.35)
T0_BTN: X1.1 X4.1 | length 839.2
  Top Layer w7: v1(200.99,314.96) X4.1
  Bottom Layer w7: v1(200.99,314.96) X1.1
T1_BTN: X1.2 X5.1 | length 2091.9
  Top Layer w7: X5.1 1812.5,314.96 1826,301.46 v1(1826,276.35)
  Bottom Layer w7: X1.2 300,288.85 312.5,276.35 v1(1826,276.35)
T2_BTN: X1.3 X6.1 | length 3023.9
  Top Layer w7: v1(2560,412.35) 2560,328.35 2573.39,314.96 X6.1
  Bottom Layer w7: X1.3 229,628.35 229,590.85 241.5,578.35 453.5,578.35 482,549.85 482,428.35 498,412.35 v1(2560,412.35)
T3_BTN: X1.4 X7.1 | length 2257.5
  Top Layer w7: X7.1 v1(2244.09,628.35)
  Bottom Layer w7: X1.4 v1(2244.09,628.35)
WL_CTS: K3.20 K3.40 K4.9 | length 4012.2
  Top Layer w7: K4.9 v1(796,1728.35) ; v1(2613.37,920.08) 2665,868.45 2696.39,868.45 2698.01,870.08 K3.20 2833.27,870.08 2857,846.35 v1(2857,836.35) ; v1(3028,1121.35) 3021,1114.35 3021,939.85 3035.81,925.03 3068.82,929.13 K3.40
  Bottom Layer w7: v1(796,1728.35) 796,936.58 812.5,920.08 1695.17,920.08 1707.18,932.09 1725.79,932.09 1737.8,920.08 v1(2613.37,920.08) ; v1(2857,836.35) 2816,839.35 2816,1103.35 2834,1121.35 v1(3028,1121.35)
WL_IO_1: K3.22 K4.26 | length 2339.1
  Top Layer w7: K4.26 1243.5,1578.35 1256,1565.85 v1(1256,945.09) ; v1(2510.69,943.35) 2510.69,837.35 2525,823.03 2652.66,823.03 2669.69,840.06 2737,840.06 2746.36,830.71 K3.22
  Bottom Layer w7: v1(1256,945.09) 2508.95,945.09 v1(2510.69,943.35)
WL_IO_2: K3.24 K4.12 | length 3220.1
  Top Layer w7: v1(455,772.35) 455,1573.35 460,1578.35 K4.12 ; v1(2609,772.35) 2629.28,772.35 2684,827.06 2714.09,827.06 2749.82,791.34 K3.24
  Bottom Layer w7: v1(455,772.35) v1(2609,772.35)
WL_IO_3: K3.25 K4.5 | length 4644.2
  Top Layer w7: v1(429,721.35) 648.71,721.35 653.31,725.95 653.31,760.53 637.5,776.35 529.5,776.35 515,790.85 515,1428.35 530,1443.35 660,1443.35 818,1601.35 818,1915.85 805.5,1928.35 K4.5 ; K3.25 v1(2844,771.65)
  Bottom Layer w7: v1(429,721.35) 1800,721.35 1817,704.35 1817,680.03 1818,679.03 2825,679.03 2844,698.03 v1(2844,771.65)
WL_IO_4: K3.26 K4.8 | length 3260.5
  Top Layer w7: K4.8 v1(667,1778.35) ; v1(2704,805.35) 2704,765.85 2717.88,751.97 K3.26
  Bottom Layer w7: v1(667,1778.35) 667,903.35 681.31,889.03 2637.5,889.03 2704,822.53 v1(2704,805.35)
WL_IO_5: K3.31 K4.6 | length 4105.7
  Top Layer w7: K4.6 683.5,1878.35 696,1865.85 v1(696,1785.35) ; K3.31 3185,749.35 3233.99,750.76 ccw(c3233.79,757.76) 3238.74,752.81 3323.5,837.57 v1(3323.5,1785.35)
  Bottom Layer w7: v1(696,1785.35) v1(3323.5,1785.35)
WL_IO_6: K3.32 K4.22 | length 3027.6
  Top Layer w7: K4.22 1000,1291.85 1038,1253.85 1038,823.35 1160,701.35 v1(1160,603.35) ; K3.32 v1(3206,771.65)
  Bottom Layer w7: v1(1160,603.35) 2997.5,603.35 3165.81,771.65 v1(3206,771.65)
WL_IO_7: K3.33 K4.20 | length 3824.2
  Top Layer w7: K4.20 v1(900,1730.35) ; K3.33 3163.49,791.34 3275,902.85 v1(3275,1754.35)
  Bottom Layer w7: v1(900,1730.35) 2068,1730.35 2092,1754.35 v1(3275,1754.35)
WL_IO_8: K3.35 K4.14 | length 3439.4
  Top Layer w7: K4.14 500,756.85 512.5,744.35 v1(632,744.35) ; v1(3053,859.35) 3053,831.71 3054,830.71 K3.35
  Bottom Layer w7: v1(632,744.35) 2762.62,744.35 2763.62,745.35 2763.62,790.85 2786.81,814.03 2876.69,814.03 2900,837.35 2985.38,837.35 2995.69,847.66 3041.31,847.66 v1(3053,859.35)
WL_RTS: K3.21 K3.38 K4.10 | length 6722.3
  Top Layer w7: K4.10 v1(637,1678.35) ; v1(2535.47,853.06) 2751.31,853.06 K3.21 ; K3.38 3160.03,889.76 3161.61,1390.85 3133,1419.46 v1(3133,1823.35)
  Bottom Layer w7: v1(2535.47,853.06) 2512.5,876.03 650,876.03 637,889.03 v1(637,1678.35) 637,1810.35 650,1823.35 v1(3133,1823.35)
WL_RX: K2.5 K4.21 R8.1 | length 2774.4
  Top Layer w7: v1(159,2063.35) 159,1819.35 160,1818.35 R8.1 ; K2.5 887.2,1067.35 886.2,1068.35 776,1068.35 767,1059.35 565.69,1059.35 564.69,1060.35 564.69,1101.35 566,1102.66 664.81,1102.66 739,1176.85 937.5,1176.85 950,1189.35 K4.21 v1(950,1985.35)
  Bottom Layer w7: v1(159,2063.35) 159,2001.35 175,1985.35 v1(950,1985.35)
WL_TX: K2.14 K4.7 | length 2710.1
  Top Layer w7: K4.7 416.5,1828.35 404,1815.85 404,1390.85 390.5,1377.35 162.5,1377.35 139,1353.85 139,480.35 140,479.35 389,479.35 509.71,600.05 925,600.05 938.39,613.44 K2.14
pads on no net: K1.8 K1.10 K1.28 K3.43 K3.44 K3.45 K3.47 K3.48 K3.49 K3.50 K3.52 K3.53 K3.54 K4.2 K4.11 K4.17 K4.18 K4.28 K4.29 K4.30 K4.31 K4.32 K4.33 K5.2 K5.7 K6.8 K6.9 K6.12 K6.13 K7. S2. X1.6 X1.7 X1.8 X1.13 X1.14 X1.15 X1.16 X2.3 X2.4 X2.5 X2.6 X2.7 X2.8 X2.9 X2.10 X3.1 X3.2 X3.3 X3.4 X3.5 X3.6

## Polygon pours and split planes (outlines as drawn)
GND on Bottom Layer "GND_L02_P001" (solid, pour order 1): 0,0 4527.56,0 4527.56,2165.35 0,2165.35
GND on Top Layer "GND_L01_P000" (solid, pour order 0): 0,0 4527.56,0 4527.56,2165.35 0,2165.35

## Silkscreen, mask and mechanical layers (free items; w line width, h text height)
Mechanical 1:
  lines w9.84: 0,196.85 ccw(c196.85,196.85) 196.85,0 4330.71,0 ccw(c4330.71,196.85) 4527.56,196.85 4527.56,1968.5 ccw(c4330.71,1968.5) 4330.71,2165.35 196.85,2165.35 ccw(c196.85,1968.5) 0,1968.5 0,196.85

## Text inside footprints (layer, text, board x,y; h text height)
X1: Bottom Overlay "1" at 180.31,443.35 h39.37 r270; Bottom Overlay "19" at 180.31,1498.35 h39.37 r270; Bottom Overlay "20" at 280.31,1498.35 h39.37 r270; Bottom Overlay "2" at 280.31,433.35 h39.37 r270
X2: Bottom Overlay "10" at 3298.35,2118.03 h39.37 r180; Bottom Overlay "1" at 2243.35,2118.03 h39.37 r180
X3: Bottom Overlay "6" at 4190,218.03 h39.37 r180; Bottom Overlay "1" at 3535,218.03 h39.37 r180